# Altium PCB ACEstat.PcbDoc (part 2 of 2)
Units mil, origin at the board's own origin, x right, y up, seen from the top; angles counter-clockwise.
Board outline 1181.1 x 2005.83 mil, 4 copper layers (Top Layer, GROUND, POWER, Bottom Layer), stack 37.677 mil thick; 67 components, 85 nets, 324 pads, 246 vias.
Unrouted connection lines stored in the file: 169.
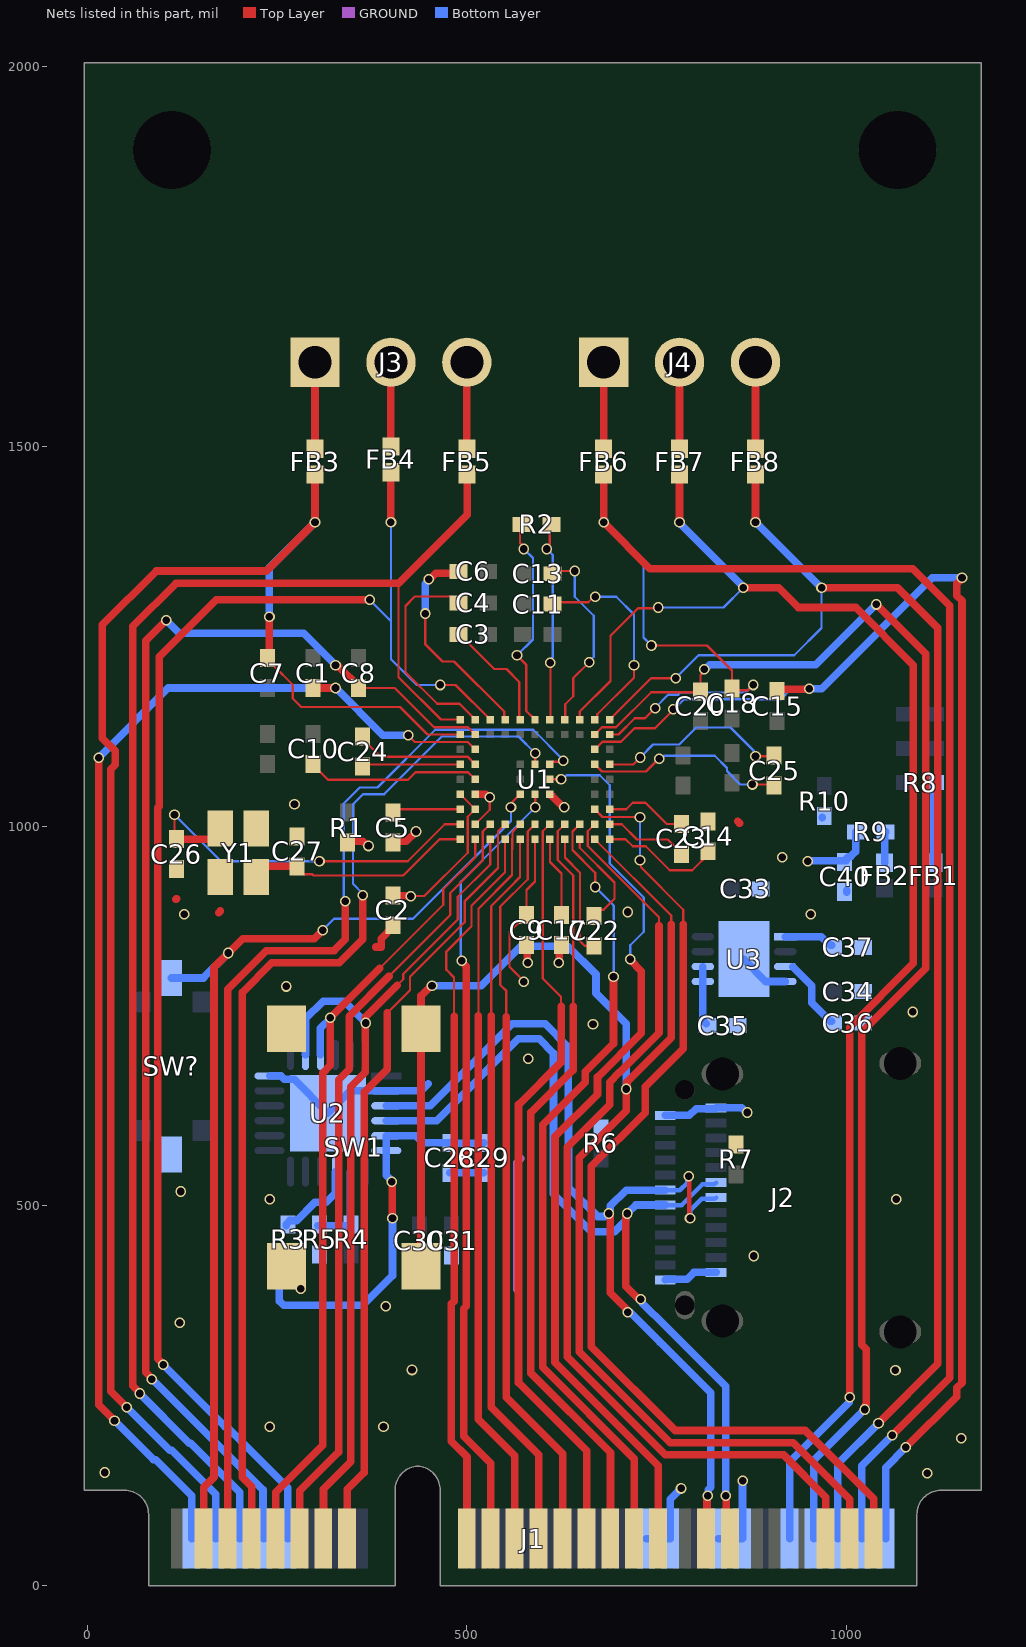
[diagram p4: the nets of this part, all layers, seen from the top]

## Via types
v1: diameter 14, hole 10, Top Layer to Bottom Layer, tented both sides, 246 vias

## Nets (pads, with @x,y where several pads share a name; then routed paths per layer and width w, separated by ;. In a path a pad name is that pad's centre, name@x,y a point inside that pad or via, vN(x,y) a via of type N, cw(c..) or ccw(c..) an arc to the next point about the centre after c; other vN are vias at no path point) (continued)
CE0: C7.1 FB3.1 J1.4 U1.B1 | length 2185
  Top Layer w3: C7.1@237.43,1221.42 237.43,1219.45 245.77,1211.11 245.89,1211.11 270.76,1186.24 270.76,1168.24 282,1157 412,1157 448.26,1120.74 U1.B1@491.26,1120.74
  Top Layer w10: v1(52,235) 31,256 31,1074.89 37,1080.89 37,1099.11 20,1116.11 20,1265 91,1336 236,1336 v1(300,1400) FB3.1@300,1463.13 ; C7.1@240,1217.72 v1(240,1276)
  Bottom Layer w10: v1(52,235) 108.6,178.4 111.6,178.4 169.44,120.56 J1.4@169.44,62.01 ; v1(240,1276) 240,1340 v1(300,1400)
CE1: C18.1 FB6.1 J1.50 U1.B11 | length 2419.4
  Top Layer w3: U1.B11@688.11,1120.74 699.74,1120.74 721.12,1142.12 734.56,1142.12 v1(747.99,1155.56) ; v1(743,1238) 816,1238 849.07,1204.93 C18.1@849.07,1181.42 851.49,1179 870,1179 v1(877,1186)
  Top Layer w10: v1(680,1400) FB6.1@680,1463.13 ; v1@680.56,1399.44 741,1339 1087,1339 1136,1290 1136,274 v1(1060,198)
  Bottom Layer w3: v1(680,1400) 732.53,1347.47 732.53,1248.47 v1(743,1238) ; v1(747.99,1155.56) 747.99,1156.03 764.96,1173 778.4,1173 781.4,1176 867,1176 v1(877,1186)
  Bottom Layer w10: J1.50@1019.83,62.01 1019.83,157.83 v1(1060,198)
DE0: C4.2 U1.A2 | length 283.1
  Top Layer w3: C4.2@488.77,1294.07 480.42,1302.42 431.42,1302.42 419.12,1290.12 419.12,1202.88 460.91,1161.09 490.28,1161.09 U1.A2@510.94,1140.43
DE1: C11.2 U1.A10 | length 277.6
  Top Layer w3: C11.2@614.69,1295 659.74,1295 666.74,1302 v1(669,1302) ; U1.A10@668.43,1140.43 671.79,1143.79 671.79,1147.27 720,1195.48 v1(720,1212)
  Bottom Layer w3: v1(669,1302) 696.83,1302 720,1278.83 v1(720,1212)
DGND: C2.1 C5.1 C9.1 C14.1 C17.1 C26.1 C27.1 C28.1 C29.1 C30.1 C31.1 C33.1 C34.1 C35.1 C36.1 C37.1 C40.1 J1.38 J1.40 J2.A1 J2.A12 J2.B1 J2.B12 R5.2 R6.2 R7.2 R10.2 SW1.3 SW1.4 SW?.2 U1.F2 U1.F7 U1.H2 U2.2 U2.18 U2.25 U3.4 U3.9 Y1.2 Y1.4 | length 1055.5
  Top Layer w3: U1.H2@510.94,1002.63 530,1021.69 v1(530,1038)
  Top Layer w10: 117,904 117.57,904.57 ; 173,886 175.38,888.38 ; 380,841 387,841 387,852.04 402.57,867.61 C2.1@402.57,869.58 ; C2.1@397.73,869.04 C2.1@400,871.32 ; C5.1@400,980.32 420.32,980.32 v1(433,993) ; U1.F2@510.94,1042 524.92,1042 528.92,1038 v1(530,1038) ; C9.1@579,840.31 579.28,840.03 579.28,820.72 v1(580,820) ; U1.F7@609.37,1042 611.46,1039.91 612.01,1039.91 626.92,1025 v1(628,1025) ; v1(621,820) 621.5,820.5 621.5,844.82 C17.1@622,845.32 ; 856.58,1006.42 859,1004
  GROUND w10: 566,390 566,556.92 571,561.92 571,563
  Bottom Layer w10: U2.18@240.18,671.21 254.76,671.21 259.4,666.58 272.42,666.58 U2.25@317,622 346.53,651.53 U2.2@393.82,651.53 394.11,651.82 439.82,651.82 449,661 ; C28.1@477.43,543.58 C29.1@522.3,543.58 ; J2.A12@761.17,402.73 761.85,403.42 789.95,403.42 799.1,412.57 J2.B1@828.09,412.57 ; J2.A1@761.17,619.27 792.99,619.27 801.93,628.2 827.19,628.2 J2.B12@828.09,629.11 828.15,629.06 861.86,629.06 867.92,623 v1(869,623) ; J1.38@830.86,62.01 862.35,62.01 862.94,62.59 862.94,137.94 v1(863,138) ; U3.9@865,825 865,823.94 893.46,795.47 U3.4@918.23,795.47 ; U3.4@918,795.25 U3.4@918.23,795.47 ; U3.4@919.25,795.47 U3.4@918.23,795.47 ; R10.2@967.69,1011.31 R10.2@968,1011.63 ; C40.1@1000,913.35 C40.1@1000,915.32
  other v1: 1106,148 23,149 1151,194 240.21,209.02 390.21,209.02 427.71,284.02 1064.31,283.61 122,346 393,368 281,391 877.71,434.02 240.21,509.02 1065.21,509.02 123,519 581,694 666,739 1086.93,755.43 262,789 127.71,884.02 952.71,884.02 712,887 915.21,959.02 273,1029
DVDD: C2.2 C9.2 C40.2 J1.32 J1.34 R1.1 R9.2 U1.F1 U1.G2 U1.J6 | length 654.4
  Top Layer w3: v1(426,908) 444,908 501,965 501,1012.37 U1.G2@510.94,1022.32 U1.F1@491.26,1042 ; v1(575,795) 575,796 564.46,806.54 cw(c576,821) 561.54,809.46 556.17,814.83 556.17,861.17 567.37,872.37 567.66,872.37 C9.2@576,880.72 ; C9.2@578.57,882.95 578.57,916.11 589.69,927.23 U1.J6@589.69,982.94
  Top Layer w10: R1.1@340,980.32 363.1,980.32 369.42,974 v1(370.5,974) ; C2.2@400,912.65 404.18,908.47 425.53,908.47 v1(426,908)
  Bottom Layer w10: J1.32@736.37,62.01 767.87,62.01 767.87,113.87 v1(782,128) ; v1(949,954) 949.34,954.34 999.66,954.34 999.66,957.14 1002.27,959.76 1005.08,959.76 1012.05,966.74 R9.2@1012.05,992.43
DVDD_REG: C17.2 U1.J7 | length 106.3
  Top Layer w3: U1.J7@609.37,982.94 609.37,953.01 624.57,937.81 C17.2@624.57,882.95
DVDD_REG_AD: C5.2 U1.G1 | length 92.3
  Top Layer w3: C5.2@400,1019.69 402.63,1022.32 U1.G1@491.26,1022.32
LPF0: C6.2 U1.A4 | length 279.6
  Top Layer w3: v1(445,1280) 445,1240 468,1217 482.99,1217 549.05,1150.94 549.05,1141.69 U1.A4@550.31,1140.43
  Top Layer w10: v1(449.72,1325.01) 450.8,1325.01 458.8,1333.01 C6.2@487.03,1333.01
  Bottom Layer w10: v1(445,1280) 445,1319.21 449.72,1323.93 v1(449.72,1325.01)
LPF1: C13.2 U1.A8 | length 249.4
  Top Layer w3: C13.2@614.69,1335 615.69,1336 v1(642,1336) ; U1.A8@629.06,1140.43 629.48,1140.85 629.48,1160.48 640,1171 640,1195 v1(661,1216)
  Bottom Layer w3: v1(642,1336) 642,1302 667,1277 667,1223.26 661,1217.26 v1(661,1216)
NetC22_1: C22.1 U1.J8 | length 163.6
  Top Layer w3: U1.J8@629.06,982.94 629.06,958.78 649,938.84 649,848.71 654.98,842.73 667.42,842.73 C22.1@667.57,842.58
NetC22_2: C22.2 U1.J9 | length 133.6
  Top Layer w3: U1.J9@648.74,982.94 648.74,971.53 694.4,925.87 694.4,904.4 680.15,890.15 675.77,890.15 C22.2@667.57,881.95
NetC23_1: C23.1 U1.H11 | length 108.5
  Top Layer w3: U1.H11@688.11,1002.63 704,1002.63 724.13,982.5 764.5,982.5 771.37,975.63 771.66,975.63 780,967.28 C23.1@780,965.32
NetC23_2: C23.2 U1.G11 | length 109.7
  Top Layer w3: U1.G11@688.11,1022.32 709.72,1022.32 718.4,1031 735.16,1031 743.08,1023.08 763.21,1002.95 C23.2@782.57,1002.95
NetC24_1: C24.1 U1.D1 | length 131.7
  Top Layer w3: C24.1@360,1080.32 361.06,1081.37 U1.D1@491.26,1081.37
NetC24_2: C24.2 U1.D2 | length 168
  Top Layer w3: C24.2@360,1119.69 360,1117.72 368.34,1109.37 368.63,1109.37 386.37,1091.63 500.68,1091.63 U1.D2@510.94,1081.37
NetC25_1: C25.1 U1.D10 | length 267.3
  Top Layer w3: U1.D10@668.43,1081.37 677.85,1071.95 735.79,1071.95 752.84,1089 v1(753.16,1089) ; v1(876,1055) 903.15,1055 C25.1@904.57,1053.58
  Bottom Layer w3: v1(753.16,1089) 756.13,1089 759.82,1092.69 826.47,1092.69 842.43,1076.73 842.43,1072.59 860.02,1055 v1(876,1055)
NetC25_2: C25.2 U1.D11 | length 255.7
  Top Layer w3: U1.D11@688.11,1081.37 719.04,1081.37 v1(728.17,1090.5) ; v1(880,1092) 903.62,1092 C25.2@904.57,1092.95
  Bottom Layer w3: v1(728.17,1090.5) 745.17,1107.5 779.5,1107.5 802,1130 847,1130 877.9,1099.1 877.9,1094.1 v1(880,1092)
NetC35_2: C35.2 U3.5 U3.6 | length 77
  Bottom Layer w10: U3.6@810.75,815.16 810.75,744.57 C35.2@815.31,740
NetC36_2: C36.2 U3.3 | length 93.9
  Bottom Layer w10: U3.3@929.14,814.93 954,790.07 954,767.72 978.35,743.37 C36.2@980.31,743.37
NetC37_2: C37.2 U3.1 | length 65.8
  Bottom Layer w10: U3.1@919.25,854.53 966.83,854.53 978.35,843.01 C37.2@980.31,843.01
NetFB1_2: FB1.2 R8.1 | length 108.3
  Bottom Layer w10: R8.1@1114.69,1060 1114.84,1059.84 1114.84,952.03 FB1.2@1115,951.87
NetFB2_2: FB2.2 R9.1 | length 41.1
  Bottom Layer w10: FB2.2@1050,951.87 1050,991.01 R9.1@1051.42,992.43
NetFB3_2: FB3.2 J3.1 | length 114.1
  Top Layer w10: FB3.2@300,1496.87 J3.1@300,1610.94
NetFB4_2: FB4.2 J3.2 | length 110.9
  Top Layer w10: FB4.2@400,1500 J3.2@400,1610.94
NetFB5_2: FB5.2 J3.3 | length 114.1
  Top Layer w10: FB5.2@500,1496.87 J3.3@500,1610.94
NetFB6_2: FB6.2 J4.1 | length 114.1
  Top Layer w10: FB6.2@680,1496.87 J4.1@680,1610.94
NetFB7_2: FB7.2 J4.2 | length 114.1
  Top Layer w10: FB7.2@780,1496.87 J4.2@780,1610.94
NetFB8_2: FB8.2 J4.3 | length 114.1
  Top Layer w10: FB8.2@880,1496.87 J4.3@880,1610.94
NetR2_1: R2.1 U1.A7 | length 261.3
  Top Layer w3: v1(605,1365) 605,1367.98 609,1371.98 609,1394.31 R2.1@609.69,1395 ; U1.A7@609.37,1140.43 610,1141.06 v1(610,1215)
  Bottom Layer w3: v1(605,1365) 613,1357 613,1222.26 612.1,1221.36 612.1,1217.1 v1(610,1215)
NetR2_2: R2.2 U1.A6 | length 280.3
  Top Layer w3: v1(566,1225) 578,1213 578,1152.11 U1.A6@589.69,1140.43 ; R2.2@570.31,1395 570,1394.68 570,1372.98 575,1367.98 v1(575,1365)
  Bottom Layer w3: v1(566,1225) 587,1246 587,1353 v1(575,1365)
NetR3_1: R3.1 U2.9 | length 112.1
  Bottom Layer w10: R3.1@261.99,473.96 261.99,475.92 266.83,480.77 275.77,480.77 300,505 315,505 326.84,516.84 U2.9@326.84,545.18
NetR4_1: R4.1 R5.1 U2.8 | length 113.4
  Bottom Layer w10: R5.1@303.49,473.96 345,473.96 346.53,475.48 U2.8@346.53,545.18
P0.0_SPI0_CLK: J1.31 U1.H9 | length 1055.9
  Top Layer w3: U1.H9@648.74,1002.63 639,992.89 639,968.54 669,938.54 v1(669,920)
  Top Layer w10: v1(693,802) 693,713.37 656,676.37 656,663 600,607 600,287.37 720.62,166.75 J1.31@720.62,62.01
  Bottom Layer w3: v1(669,920) 693.5,895.5 693.5,887 693.5,802.5 v1(693,802)
P0.1_SPI0_MOSI: J1.29 U1.H8 | length 1019.7
  Top Layer w3: U1.H8@629.06,1002.63 619.63,993.21 619.63,955.47 640,935.11 640,763
  Top Layer w10: 640,763 640,679 584,623 584,280 689.13,174.87 J1.29@689.13,62.01
P0.2_SPI0_M\I\S\O\: J1.27 U1.H7 | length 1014.8
  Top Layer w3: U1.H7@609.37,1002.63 599.95,993.21 599.95,976.16 600,976.11 600,799.53 624,775.53 624,763
  Top Layer w10: 624,763 624,689.51 568,633.51 568,267 657.63,177.37 J1.27@657.63,62.01
P0.3_SPI0_C\S\: J1.25 U1.H6 | length 1003.9
  Top Layer w3: 552,738.69 552,783 544,791 544,894.27 580,930.27 580,992.94 U1.H6@589.69,1002.63
  Top Layer w10: 552,749 552,248 626.13,173.87 J1.25@626.13,62.01
P0.4_I2C_SCL: J1.23 U1.J5 | length 961.6
  Top Layer w3: 532,751 532,895 556,919 570,933 U1.J5@570,982.94
  Top Layer w10: 532.33,750.12 532.33,234.67 594.64,172.36 J1.23@594.64,62.01
P0.5_I2C_SDA: J1.21 U1.H5 | length 982.9
  Top Layer w3: 515.17,750.05 515.17,891.44 559.34,935.61 559.34,960.63 559.34,960.71 559.74,976.16 560,992.63 560.88,993.51 U1.H5@570,1002.63
  Top Layer w10: 515.17,750.05 515.17,218.83 563.14,170.86 J1.21@563.14,62.01
P0.10/UART_SOUT: J1.13 U1.J3 U2.20 | length 1160.6
  Top Layer w3: 408.31,790.69 416.13,798.5 416.13,805.42 488,877.3 488,907 530.63,949.63 U1.J3@530.63,982.94
  Top Layer w10: J1.13@311.17,62.01 311.17,127.17 347,163 347,657 366,676 366,737.06 366.23,737.29 366.23,740.65 366,740.89 366,748.37 408.31,790.69
  Bottom Layer w10: U2.20@287.47,698.82 287.47,746.21 310.89,769.63 338.26,769.63 v1(367,740.89)
P0.11/UART_SIN: J1.9 U1.J2 U2.21 | length 1083.9
  Top Layer w3: 385.19,812.81 469,896.63 469,917 510.94,958.94 U1.J2@510.94,982.94
  Top Layer w10: J1.9@248.18,62.01 248.18,123.18 310,185 310,675 320,685 v1(320,747.63) 385.19,812.81
  Bottom Layer w10: U2.21@307.16,698.82 307.16,733.7 320,746.54 v1(320,747.63)
P1.0/SYS_WAKE: J1.3 SW?.1 U1.F5 | length 1357
  Top Layer w3: v1(558,1025) 560.1,1027.1 560.1,1032.1 U1.F5@570,1042
  Top Layer w10: J1.3@153.69,62.01 153.69,129.69 167,143 167,814 v1(186,833) 205,852 299,852 v1(310,863)
  Bottom Layer w3: v1(310,863) 325,878 429,878 558,1007 v1(558,1025)
  Bottom Layer w10: SW?.1@111,800.14 153.14,800.14 v1(186,833)
P1.2_SPI1_CLK: J1.33 U1.E7 | length 1213.9
  Top Layer w3: U1.E7@609.37,1061.69 609.68,1062 v1(624,1062)
  Top Layer w10: v1(715,825) 715,823.92 729.77,809.15 729.77,727.51 672,669.74 672,647 616,591 616,294 752.12,157.88 J1.33@752.12,62.01
  Bottom Layer w3: v1(624,1062) 626.26,1062 631.26,1067 675,1067 688,1054 688,951 733,906 733,861.11 715,843.11 v1(715,825)
P1.3_SPI1_MOSI: J1.5 U1.D7 | length 1453.5
  Top Layer w3: U1.D7@609.37,1081.37 612.79,1084.79 625.79,1084.79 v1(627,1086)
  Top Layer w6: 299.03,836 301.03,834
  Top Layer w10: J1.5@185.19,62.01 185.19,785.19 236,836 299.03,836 325,836 340,851 v1@340,900.14
  Bottom Layer w3: v1(340,901) 338,903 338,1030 359,1051 382.28,1051 458.28,1127 587.28,1127 v1@627,1087.28
  Bottom Layer w6: v1(627,1086) v1@627,1087.28
P1.4_SPI1_MISO: J1.19 U1.F6 | length 1040.1
  Top Layer w3: U1.F6@589.69,1042 590,1041.68 v1(590,1025)
  Top Layer w10: v1(493,823) 493,821.92 499.17,815.75 499.17,368.17 495.63,364.63 495.63,197 531.65,160.98 J1.19@531.65,62.01
  Bottom Layer w3: v1(493,823) 492,824 492,927 v1(590,1025)
P1.5_SPI1_C\S\: J1.7 U1.D6 | length 1396
  Top Layer w3: U1.D6@589.69,1081.37 590,1081.69 v1(590,1096)
  Top Layer w10: J1.7@216.69,62.01 216.69,130.31 204,143 204,781 243,820 299.03,820 331.63,820 363,851.37 v1(363,909)
  Bottom Layer w3: v1@363,911.16 350,924.16 350,1028.77 363.23,1042 391,1042 467,1118 568,1118 v1(590,1096)
  Bottom Layer w6: v1(363,909) v1@363,911.16
P2.4: J1.17 U1.J4 | length 967.1
  Top Layer w3: 483.17,750 483.17,800.83 473,811 473,835 506.17,868.17 506.17,895.17 550.31,939.31 U1.J4@550.31,982.94
  Top Layer w10: 483.17,750 483.17,374.79 479.63,371.25 479.63,190.37 500.15,169.85 J1.17@500.15,62.01
PWM0: J1.51 U1.G10 | length 1341.8
  Top Layer w3: U1.G10@668.43,1022.32 678.69,1012.05 727.95,1012.05 v1(728,1012) ; v1(728,955) 729.13,953.87 729.13,945.87 785,890 785,871
  Top Layer w10: 785,871 785,707 735,657 735,623 664,552 664,314.82 774.54,204.28 945.72,204.28 1035.58,114.42 J1.51@1035.58,62.01
  Bottom Layer w3: v1(728,955) v1(728,1012)
PWM1: J1.47 U1.H10 | length 1265.9
  Top Layer w3: U1.H10@668.43,1002.63 659,993.21 659,974 753,880 753,869
  Top Layer w10: 753,869 753,728 701,676 700.89,676 688,663.11 688,633 632,577 632,301.57 761.28,172.28 916.9,172.28 972.59,116.59 J1.47@972.59,62.01
RE0: FB5.1 J1.6 U1.A1 | length 2042.9
  Top Layer w3: 410,1320 410,1196.28 465.85,1140.43 U1.A1@491.26,1140.43
  Top Layer w10: v1(69,253) 69,254.08 60,263.08 60,1263 117,1320 410,1320 500.28,1410.28 500.28,1462.85 FB5.1@500,1463.13
  Bottom Layer w10: v1(69,253) 134.35,187.65 136.35,187.65 200.94,123.06 J1.6@200.94,62.01
RE1: FB8.1 J1.48 U1.A11 | length 1996.1
  Top Layer w3: U1.A11@688.11,1140.43 742.69,1195 v1(775,1195)
  Top Layer w10: v1(880,1400) FB8.1@880,1463.13 ; v1(967,1314) 1067,1314 1120,1261 1120,292 v1(1042,214)
  Bottom Layer w3: v1(775,1195) 805,1225 931,1225 967,1261 v1(967,1314)
  Bottom Layer w10: v1(880,1400) 880.5,1400 966.5,1314 v1(967,1314) ; J1.48@988.34,62.01 988.34,160.34 v1(1042,214)
RESET: J1.49 SW1.1 SW1.2 U1.J10 | length 2051.5
  Top Layer w3: U1.J10@668.43,982.94 769,882.37 769,871
  Top Layer w10: SW1.2@439.58,420.5 439.58,776.67 452.92,790 v1(454,790) ; 769,871 769,721.37 710.77,663.14 710.77,654.77 v1(710,654) 710,625.35 648,563.35 648,308.19 767.91,188.28 929.72,188.28 1004.09,113.91 J1.49@1004.09,62.01
  Bottom Layer w10: v1(454,790) 518.89,790 570.89,842 633,842 670,805 670,780 710,740 v1(710,654)
SWCLK: J1.11 U1.H3 | length 1044.6
  Top Layer w3: 397.42,802.42 478,883 478,912 521,955 521,993 U1.H3@530.63,1002.63
  Top Layer w10: J1.11@279.68,62.01 279.68,124.68 331,176 331,666 345,680 345,750 397.42,802.42
SWDIO: J1.15 U1.H4 | length 1026.6
  Top Layer w3: 395,754 425.13,784.13 425.13,801.7 497,873.57 497,901 540.89,944.89 540.89,993.21 U1.H4@550.31,1002.63
  Top Layer w10: J1.15@342.67,62.01 342.67,126.67 365,149 365,650 395,680 395,754
USBD_N: J1.39 J2.A7 J2.B7 U2.4 | length 1209.8
  Top Layer w10: v1(711,490) 711,488.92 709,486.92 709,394.11 726.14,376.97 v1(728.97,376.97) ; v1(840.94,118.38) 841.7,117.61 841.7,66.91 J1.39@846.61,62.01
  Bottom Layer w6: J2.A7@761.17,501.16 782.94,501.16 810.08,528.29 825.7,528.29 J2.B7@828.09,530.68
  Bottom Layer w10: U2.4@393.82,612.16 460,612.16 567.84,720 595,720 614,701 614,516 663.76,466.24 694.36,466.24 709,480.89 709,486.92 711,488.92 v1(711,490) ; v1@711.77,490.77 722.16,501.16 J2.A7@761.17,501.16 ; v1(728.97,376.97) 730.97,374.97 730.97,372.14 762.27,340.84 762.44,340.84 840.94,262.35 v1(840.94,118.38)
USBD_P: J1.37 J2.A6 J2.B6 U2.3 | length 1281.3
  Top Layer w6: v1(791.95,538.99) 792.9,538.04 792.9,484.74 v1(793.86,483.79)
  Top Layer w10: v1(687,490) 687,488.92 689,486.92 689,385.83 710,364.83 710,362 v1(712,360) ; J1.37@815.11,62.01 816.17,63.07 816.17,117.48 v1(816.94,118.25)
  Bottom Layer w6: J2.A6@761.17,520.84 761.58,520.43 780.43,520.43 790.41,530.41 790.41,537.46 v1(791.95,538.99) ; v1(793.86,483.79) 794.14,484.07 794.14,494.14 809.34,509.34 826.44,509.34 J2.B6@828.09,511
  Bottom Layer w10: U2.3@393.82,631.84 451.84,631.84 559.69,739.68 603.15,739.68 633.69,709.15 633.69,638.76 633.84,638.6 633.84,524.22 671.97,486.09 682,486.09 685.92,490 v1(687,490) ; v1@687,491 687.77,491.77 687.77,492.85 689,494.08 689,500.11 709.73,520.84 J2.A6@761.17,520.84 ; v1(712,360) 714.83,360 753.99,320.84 754.16,320.84 820.94,254.06 820.94,129.49 818.94,127.49 818.94,127.36 817.7,126.12 817.7,119.01 v1(816.94,118.25)
VBIAS0: C1.2 J1.2 U1.C2 | length 1675.8
  Top Layer w3: v1(422.58,1119.58) 431.42,1110.74 501.26,1110.74 U1.C2@510.94,1101.06
  Top Layer w10: v1(15,1090) 15,238 v1(36,217) ; C1.2@300.32,1180.04 302.27,1182 v1(327,1182)
  Bottom Layer w10: v1(15,1090) 107,1182 v1(327,1182) 389.42,1119.58 v1(422.58,1119.58) ; v1(36,217) 87.36,165.64 90.36,165.64 137.95,118.05 J1.2@137.95,62.01
VBIAS1: C15.2 J1.52 U1.C10 | length 1935.3
  Top Layer w3: U1.C10@668.43,1101.06 678.69,1111.32 703.05,1111.32 720.67,1128.94 747.54,1128.94 771.93,1153.33 v1(771.93,1153.8)
  Top Layer w10: C15.2@906.16,1179.84 913.02,1179.84 913.41,1180.23 950.23,1180.23 v1(951,1181) ; v1(1078,182) 1145,249 1145,260.37 1152,267.37 1152,1296.63 1145,1303.63 1145,1319.14 1152,1326.14 v1(1152,1327)
  Bottom Layer w3: v1(771.93,1153.8) 785.12,1167 913,1167 927,1181 v1(951,1181)
  Bottom Layer w10: v1(951,1181) 967,1181 1113,1327 v1(1152,1327) ; J1.52@1051.33,62.01 1051.33,155.33 v1(1078,182)
VDCDC_CAPOUT: C14.2 U1.J11 | length 158.5
  Top Layer w3: U1.J11@688.11,982.94 708.87,982.94 718.32,973.5 735.66,973.5 767.16,942 796.69,942 C14.2@820,965.31
VREF_1.82V: C3.2 U1.A5 | length 149.9
  Top Layer w3: C3.2@488.77,1252.57 C3.2@490.73,1252.57 ; C3.2@495.21,1247.79 495.51,1247.79 499.08,1244.23 499.08,1243.92 536,1207 552,1207 569,1190 569,1141.43 U1.A5@570,1140.43
VREF_2.5V: C10.2 U1.E2 | length 228.2
  Top Layer w3: C10.2@300,1080.31 300,1078.35 308.34,1070 317.35,1061 422.27,1061 425.28,1064 425.37,1064 432.47,1071.11 501.52,1071.11 U1.E2@510.94,1061.69
VREGOUT: C28.2 C29.2 R3.2 U2.5 U2.6 | length 552.1
  Top Layer w10: v1(401,532) 401.5,531.5 401.5,484.5 v1(402,484)
  Bottom Layer w10: R3.2@261.99,434.59 261.99,407.77 253,398.79 253,374.86 258.86,369 362.89,369 402,408.11 v1(402,484) ; v1(401,532) 401,533.08 393.82,540.26 U2.5@393.82,592.47 432.53,592.47 442.05,582.95 C28.2@477.43,582.95 478.43,581.96 480.79,581.96 481.29,582.45 521.8,582.45 C29.2@522.3,582.95
VZERO0: C8.2 J1.8 U1.B2 | length 1759.8
  Top Layer w3: C8.2@357.43,1182.05 404.95,1182.05 456.84,1130.16 501.52,1130.16 U1.B2@510.94,1120.74
  Top Layer w10: v1(85,272) 85,273.08 77,281.08 77,1244 v1(104,1271) ; v1(327,1212) 327.77,1211.23 330.22,1211.23 360,1181.45 C8.2@360,1178.84
  Bottom Layer w10: v1(85,272) 86,272 231.48,126.52 231.48,62.96 J1.8@232.43,62.01 ; v1(104,1271) 121,1254 285,1254 v1(327,1212)
VZERO1: C20.2 J1.46 U1.B10 | length 1776.4
  Top Layer w3: U1.B10@668.43,1120.74 677.85,1130.16 696.43,1130.16 742.77,1176.5 802.13,1176.5 C20.2@805,1179.37 ; C20.2@807.57,1177.63 807.57,1199.24 812.66,1204.34 v1(812.66,1206.5)
  Top Layer w10: v1(1024,232) 1024.77,232.77 1024.77,237.65 1026,238.89 1026,311 1020,317 1020,728.75 1104,812.75 1104,1227 v1(1039,1292)
  Bottom Layer w10: v1(812.66,1206.5) 813.75,1206.5 819.75,1212.5 959.5,1212.5 v1(1039,1292) ; J1.46@956.84,62.01 956.84,164.84 v1(1024,232)
WE0: FB4.1 J1.10 U1.A3 | length 1991.2
  Top Layer w3: v1(465,1186) 485.06,1186 U1.A3@530.63,1140.43
  Top Layer w10: v1(100,291) 100,291.86 93,298.86 93,1024.11 95,1026.11 95,1223 170,1298 v1(372,1298) ; v1(400,1400) FB4.1@400,1466.25
  Bottom Layer w3: v1(372,1298) 400,1270 ; v1(400,1400) 400,1270 ; v1(465,1186) 434,1186 400,1220 400,1270
  Bottom Layer w10: v1(100,291) 181.42,209.58 183.28,209.58 263.93,128.93 J1.10@263.93,62.01
WE1: FB7.1 J1.44 U1.A9 | length 1988.6
  Top Layer w3: U1.A9@648.74,1140.43 648.74,1151.01 689,1191.27 689,1250.82 725.18,1287 751,1287 v1(752,1288)
  Top Layer w10: v1(780,1400) FB7.1@780,1463.13 ; v1(864,1314) 910.54,1314 936.54,1288 1011.89,1288 1088,1211.89 1088,819.37 1004,735.37 v1(1004,248)
  Bottom Layer w3: v1(752,1288) 838,1288 v1(864,1314) ; v1@780,1399 v1(780,1400)
  Bottom Layer w10: v1@780,1399 864,1315 v1(864,1314) ; J1.44@925.35,62.01 925.35,163.35 v1@1003.23,241.23
XTALI: C26.2 U1.H1 Y1.1 | length 515.2
  Top Layer w3: C26.2@115,986.65 115,991.5 v1(115,1015) ; v1(305.84,953.71) 422.08,953.71 471,1002.63 U1.H1@491.26,1002.63
  Top Layer w10: C26.2@117.57,982.95 163.65,982.95 175.38,994.68 Y1.1@175.38,996.99
  Bottom Layer w3: v1(115,1015) 176.29,953.71 v1(305.84,953.71)
XTALO: C27.2 U1.J1 Y1.3 | length 296.9
  Top Layer w3: C27.2@279,943.35 279,942.51 284.77,936.74 296.65,936.74 298.18,935.21 416.31,935.21 464.05,982.94 U1.J1@491.26,982.94
  Top Layer w10: Y1.3@222.62,933.01 222.62,935.32 234.35,947.05 C27.2@276.43,947.05
pads on no net: J1.12 J1.14 J1.16 J1.30 J1.35 J1.36 J1.42 J1.43 J1.45 J2. J2.1 J2.2 J2.3 J2.4 J2.A2 J2.A3 J2.A8 J2.A10 J2.A11 J2.B2 J2.B3 J2.B8 J2.B10 J2.B11 SW?.3 SW?.4 SW?.5 SW?.6 U1.E5 U1.E10 U2.1 U2.10 U2.11 U2.12 U2.13 U2.14 U2.15 U2.16 U2.17 U2.19 U2.22 U2.23 U2.24

## Polygon pours and split planes (outlines as drawn)
AGND on Bottom Layer "AGND_L04_P004" (solid, pour order 4): 538,1054.81 538,1103 641,1103 641,1034.81 1177.32,1034.81 1177.32,2005.42 -3.79,2005.42 -3.79,1054.81 468.16,1054.81
DGND on Bottom Layer "DGND_L04_P007" (solid, remove dead copper, pour order 7): 543,1049 543,1099 637,1099 637,1030 1177.32,1030 1177.32,125.48 475,125.48 475,167 395,167 395,125.48 -5,125.48 -5,1049 233,1049
DGND on Top Layer "DGND_L01_P006" (solid, pour order 6): 542,1050 542,1099 636,1099 636,1029 1177.32,1029 1177.32,125.57 475,125.57 475,167 395,167 395,125.48 -5,125.48 -5,1050
AGND on Top Layer "AGND_L01_P005" (solid, pour order 5): 539,1054 539,1103 641,1103 641,1035 1177.32,1035 1177.32,2005.42 -3.79,2005.42 -3.79,1054
DGND on GROUND "DGND_L02_P009" (solid, pour order 9): 542.32,1048.86 542.32,1099 636.81,1099 636.81,1030.51 1177.32,1030.51 1177.32,125.48 475,125.48 475,167 395,167 395,125.48 -5,125.48 -5,1048.86 232,1048.86
AGND on GROUND "AGND_L02_P010" (solid, pour order 10): 537.97,1055 537.97,1104 640.75,1104 640.75,1034.45 1177.13,1034.45 1177.13,2005.6 -3.97,2005.6 -3.97,1055 467.97,1055
DVDD on POWER "DVDD_L03_P011" (solid, pour order 11): 542,1050 542,1099 637,1099 637,1030 1177.32,1030 1177.32,125.48 475,125.48 475,167 395,167 395,125.48 -5,125.48 -5,1050
AVDD on POWER "AVDD_L03_P012" (solid, pour order 12): 538,1054.43 538,1103.43 641.84,1103.43 641.84,1034.43 1177.16,1034.43 1177.16,2005.04 -3.94,2005.04 -3.94,1054.43 468,1054.43
no net on Top Solder "NONET_L-01_P-001" (solid): 1178,98 1178,-21 -6,-21 -6,98
no net on Bottom Solder "NONET_L-01_P-001" (solid): 1178,98 1178,-21 -6,-21 -6,98

## Keep-outs
Top Layer:
  rectangle: 950,1775 1178,2005
  rectangle: -5,1776 226,2005
  rectangle: -4,2005 226,2006
  region: 445,705 445,460 370,460 370,705
Bottom Layer:
  rectangle: 1090,1079 1138,1086
  rectangle: 1087,1119 1111,1134
  region: 702,1290 710,1282 710,1201 702,1193 700,1195 669,1195 669,1208 672,1211 672,1292 698,1292 699,1293 704,1288 704,1287 707,1284
  region: 800,226 811,226 807,222 807,116 708,116 708,135 709,135

## Silkscreen, mask and mechanical layers (free items; w line width, h text height)
Top Overlay:
  text "CE0" at 275,1535 h20
  text "WE0" at 375,1535 h20
  text "RE0" at 475,1535 h20
  text "CE1" at 655,1535 h20
  text "WE1" at 755,1535 h20
  text "RE1" at 855,1535 h20
Bottom Overlay:
  drawing of 8 lines, arcs and shapes, not listed
  text "ACEstat V2.0" at 695,1660 h39.37
  text "CE0" at 326.65,1535 h20
  text "WE0" at 426.65,1535 h20
  text "RE0" at 526.65,1535 h20
  text "CE1" at 701.65,1535 h20
  text "WE1" at 801.65,1535 h20
  text "RE1" at 901.65,1535 h20
Board Outline:
  lines w0: 464.77,125.5 ccw(c433.64,126.15) 435.2,157.25 ccw(c436.75,126.14) 405.62,125.5 405.65,125.5 405.66,-0.41 80.86,-0.41 80.86,94.08 ccw(c49.39,94.03) 49.35,125.49 -3.79,125.57 -3.79,2005.42 1177.32,2005.42 1177.32,125.5 1124.17,125.48 ccw(c1124.17,93.98) 1092.67,93.98 1092.67,-0.41 465,-0.41 464.74,125.5 ; 464.74,125.5 464.77,125.5
  lines w1.97: -2.32,1776.18 226.02,1776.18 226.02,2004.53 ; 950.35,2004.53 950.35,1776.18 1178.7,1776.18